# Altium PCB PCB1.pcbdoc (part 2 of 2)
Units mil, origin at the board's own origin, x right, y up, seen from the top; angles counter-clockwise.
Board outline 2760.2 x 1953.83 mil, 2 copper layers (Top Layer, Bottom Layer); 18 components, 51 nets, 238 pads, 251 vias.
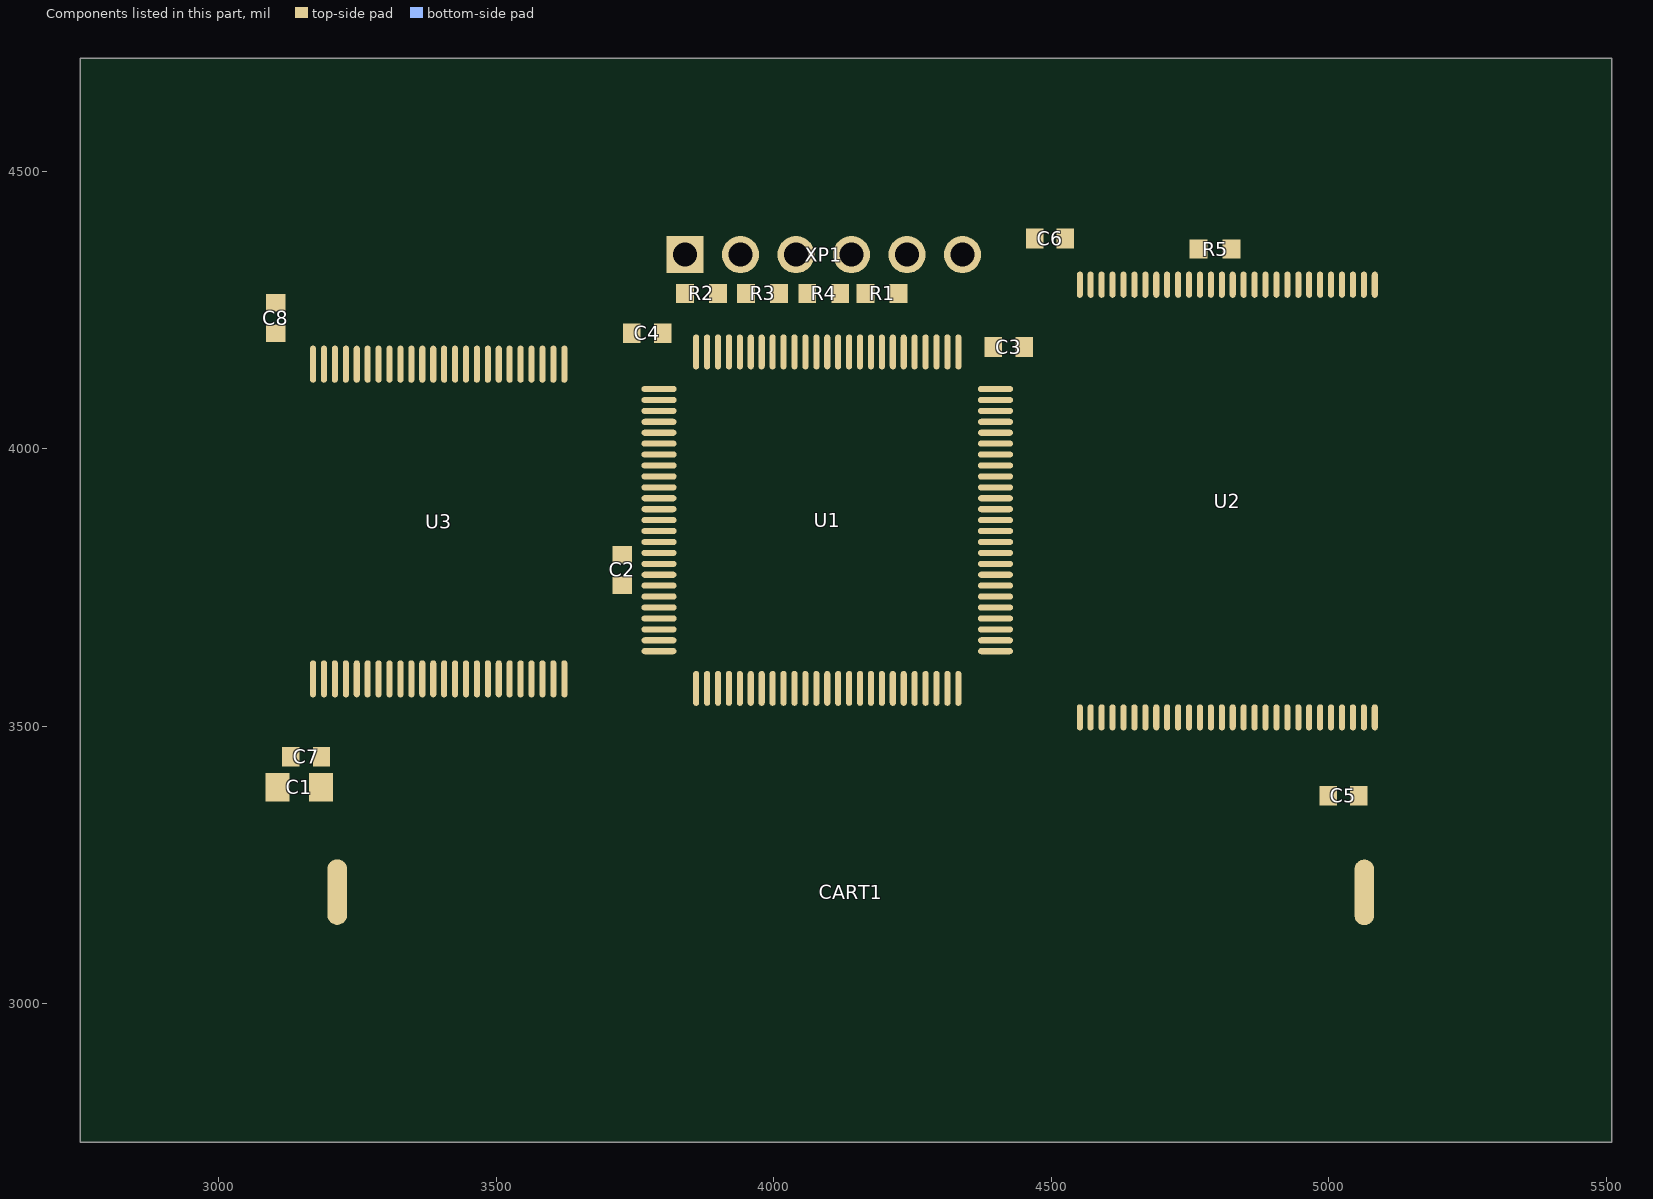
[diagram p2: the components of this part, seen from the top]

## Other copper
Top Layer:
  region net VCC: 3190,3430.28 3180,3430.28 3167.5,3415.28 3202.5,3415.28
  region net VCC: 3209.93,3357.05 3216.63,3364.5 3206.02,3392.78 3185.21,3364.1
  region net VCC: 3904.02,3612.23 3894.02,3609.96 3893.95,3594.13 3904.98,3594.13
  region net TDI: 3924.16,3611.45 3914.16,3611.45 3913.64,3594.13 3924.67,3594.13
  region net ~WR~: 3964.01,3609.67 3954.01,3612.29 3953.01,3594.13 3964.04,3594.13
  region net AD2: 4100.98,3535.21 4101.83,3542.16 4090.8,3542.16 4090.98,3535.21
  region net AD3: 4121.27,3532.87 4121.52,3542.16 4110.49,3542.16 4111.27,3532.87
  region net AD5: 4169.57,3535.06 4179.57,3535.06 4180.57,3542.16 4169.54,3542.16
  region net VCC: 4199.59,3611.64 4189.59,3611.07 4189.23,3594.13 4200.26,3594.13
  region net AD6: 4209.68,3612.03 4208.91,3594.13 4219.94,3594.13 4219.69,3610.57
  region net AD8: 4249.02,3532.82 4259.02,3532.82 4259.31,3542.16 4248.28,3542.16
  region net AD10: 4327.85,3533.37 4337.85,3533.37 4338.05,3542.16 4327.02,3542.16
  region net VCC: 4443.57,3650.2 4441.26,3660.2 4425.45,3660.26 4425.45,3649.24
  region net VCC: 4356.81,3659.82 4356.81,3649.82 4373.48,3649.24 4373.48,3660.26
  region net AD12: 4442.94,3679.3 4425.45,3679.95 4425.45,3668.93 4442.58,3669.3
  region net AD12: 4365.98,3679.47 4365.98,3669.47 4373.48,3668.93 4373.48,3679.95
  region net AD11: 4442.39,3699.28 4425.45,3699.63 4425.45,3688.61 4443.09,3689.28
  region net VCC: 4357.24,3787.36 4373.48,3787.04 4373.48,3798.06 4357.24,3797.36
  region net FA15: 4436.5,3856.6 4425.45,3857.11 4425.45,3846.09 4436.5,3846.6
  region net VCC: 4366.86,3886.38 4373.48,3885.46 4373.48,3896.48 4366.86,3896.38
  region net FA14: 4442.82,3905.69 4442.72,3915.69 4425.45,3916.17 4425.45,3905.15
  region net FA13: 4443.22,3935.11 4425.45,3935.85 4425.45,3924.83 4442.18,3925.11
  region net FA7: 4364.65,4023.67 4373.48,4023.26 4373.48,4034.28 4364.65,4033.67
  region net FA9: 4442.77,4063.14 4442.77,4073.14 4425.45,4073.65 4425.45,4062.63
  region net FA8: 4442.1,4082.26 4443.3,4092.24 4425.45,4093.33 4425.45,4082.31
  region net FA8: 4365.65,4083.12 4373.48,4082.31 4373.48,4093.33 4365.65,4093.12
  region net FA7: 4438.62,4102.18 4438.62,4112.18 4425.45,4113.02 4425.45,4102
  region net FA3: 4317.45,4130.41 4318.37,4148.46 4307.34,4148.46 4307.45,4132.39
  region net FA4: 4268.69,4130.74 4278.69,4131.64 4279,4148.46 4267.97,4148.46
  region net FA6: 4209.37,4131.4 4219.37,4131.4 4219.94,4148.46 4208.91,4148.46
  region net FA2: 4189.75,4209.43 4189.23,4200.43 4200.26,4200.43 4199.75,4209.43
  region net FA1: 4150.38,4217.75 4149.86,4200.43 4160.89,4200.43 4160.38,4217.75
  region net FA0: 4130.69,4131.14 4140.69,4131.14 4141.2,4148.46 4130.17,4148.46
  region net FA0: 4130.69,4217.75 4130.17,4200.43 4141.2,4200.43 4140.69,4217.75
  region net TCK: 4121.01,4217.75 4111.01,4217.75 4110.49,4200.43 4121.52,4200.43
  region net TMS: 4101.32,4131.14 4101.83,4148.46 4090.8,4148.46 4091.32,4131.14
  region net TMS: 4101.32,4217.75 4091.32,4217.75 4090.8,4200.43 4101.83,4200.43
  region net VCC: 4032.26,4217.39 4031.75,4200.43 4042.78,4200.43 4042.26,4218.03
  region net TDI: 3924.16,4131.14 3924.67,4148.46 3913.64,4148.46 3914.16,4131.14
  region net TDO: 3894.47,4217.75 3893.95,4200.43 3904.98,4200.43 3904.47,4217.75
  region net VCC: 3749.1,3984.83 3767.18,3983.89 3767.18,3994.91 3751.24,3994.83
  region net VCC: 3750.13,3817.35 3749.62,3807.35 3767.18,3806.72 3767.18,3817.74
  region net VCC: 3835.94,3817.45 3819.15,3817.74 3819.15,3806.72 3836.89,3807.45
  region net AD13: 3836.08,3778.03 3819.15,3778.37 3819.15,3767.35 3836.8,3768.03
  region net VCC: 3759.82,3817.35 3744.82,3824.83 3744.82,3794.85 3759.82,3807.35
  region net VCC: 3700.79,3821.91 3709.38,3793.34 3709.38,3824.83 3707.86,3828.98
  region net VCC: 4365.09,4187.62 4365.09,4177.62 4380.09,4165.45 4380.09,4200.12
  region net TCK: 4191.81,4296.27 4188.69,4307.29 4160.41,4296.69 4181.2,4267.98
  region net VCC: 3809.1,4274.96 3824.1,4262.69 3824.1,4296.69 3809.1,4284.96
  region net VCC: 3835,4311.69 3824.1,4296.69 3855.9,4296.69 3845,4311.69
  region net TDO: 3894.47,4247.69 3904.47,4247.69 3915.3,4262.69 3883.5,4262.69
  region net TDO: 3925.91,4299.12 3919.94,4307.29 3891.65,4296.69 3915.3,4270.84
  region net VCC: 4033.61,4252.08 4025.3,4278.07 3993.5,4262.69 4019.47,4252.08
  region net TDI: 3929.46,4252.08 3957.75,4262.69 3934.1,4288.53 3923.49,4260.25
  region net TDI: 3976.51,4299.12 3970.54,4307.29 3942.25,4296.69 3965.9,4270.84
  region net A23: 5077.81,4260.31 5087.81,4259.9 5088.41,4277.38 5077.41,4277.38
  region net A22: 5058.66,4259.3 5068.66,4261.64 5068.71,4277.38 5057.71,4277.38
  region net FA11: 4959.67,4260.18 4969.67,4260.01 4970.21,4277.38 4959.21,4277.38
  region net FA10: 4940.48,4259.41 4950.48,4261.21 4950.61,4277.38 4939.61,4277.38
  region net FA9: 4920.17,4260.72 4930.17,4259.62 4930.91,4277.38 4919.91,4277.38
  region net $1N60766: 4831.91,4330.88 4821.91,4330.88 4821.41,4313.58 4832.41,4313.58
  region net FA7: 4703.73,4260.28 4713.73,4259.92 4714.31,4277.38 4703.31,4277.38
  region net FA6: 4693.82,4320.66 4683.82,4320.66 4683.71,4313.58 4694.71,4313.58
  region net FA5: 4674.25,4331.37 4664.25,4330.2 4664.01,4313.58 4675.01,4313.58
  region net FA2: 4605,4267.39 4615,4267.39 4615.91,4277.38 4604.91,4277.38
  region net FA0: 4596.09,3542.16 4586.09,3542.16 4585.21,3533.98 4596.21,3533.98
  region net AD0: 4664.08,3542.58 4664.01,3533.98 4675.01,3533.98 4674.08,3542.58
  region net AD8: 4684.34,3541.67 4683.71,3533.98 4694.71,3533.98 4694.34,3541.67
  region net AD9: 4733.19,3551.88 4723.19,3550.36 4723.01,3533.98 4734.01,3533.98
  region net AD2: 4753.16,3551.37 4743.16,3551.17 4742.71,3533.98 4753.71,3533.98
  region net AD3: 4792.79,3480.93 4793.11,3497.78 4782.11,3497.78 4782.79,3480.14
  region net AD11: 4801.82,3549.27 4801.81,3533.98 4812.81,3533.98 4811.82,3551.68
  region net AD12: 4870.86,3479.7 4871.81,3497.78 4860.81,3497.78 4860.86,3482.03
  region net AD14: 4949.68,3479.72 4950.61,3497.78 4939.61,3497.78 4939.68,3481.92
  region net AD7: 4970,3550.49 4960,3551.83 4959.21,3533.98 4970.21,3533.98
  region net AD15: 4989.41,3551.28 4979.41,3551.28 4978.91,3533.98 4989.91,3533.98
  region net AD9: 3598.03,4106.58 3608.03,4107.47 3608.33,4124.26 3597.33,4124.26
  region net ~WR~: 3518.82,4110.59 3528.82,4110.59 3529.53,4124.26 3518.53,4124.26
  region net VCC: 3509.31,4185.46 3499.31,4185.46 3499.12,4181.57 3509.6,4182.03
  region net AD15: 3480,4106.46 3490,4107.68 3490.23,4124.26 3479.23,4124.26
  region net VCC: 3440.81,4193.31 3439.83,4180.16 3450.83,4180.16 3450.81,4193.31
  region net AD6: 3204.1,4107.05 3214.1,4106.9 3214.63,4124.26 3203.63,4124.26
  region net AD5: 3183.96,4108.74 3193.96,4106.14 3194.93,4124.26 3183.93,4124.26
  region net AD10: 3568,3631.23 3558,3629.02 3557.93,3613.16 3568.93,3613.16
  region net ~CS2~: 3539.17,3631.24 3538.23,3613.16 3549.23,3613.16 3549.17,3628.96
  region net A22: 3489.49,3630.91 3479.49,3629.84 3479.23,3613.16 3490.23,3613.16
  region net A21: 3459.6,3629.03 3459.53,3613.16 3470.53,3613.16 3469.6,3631.22
  region net A19: 3420.36,3629.74 3420.13,3613.16 3431.13,3613.16 3430.36,3630.97
  region net VCC: 3400.85,3551.34 3410.85,3551.34 3411.43,3557.26 3400.43,3557.26
  region net A18: 3371.74,3619.16 3361.74,3619.16 3361.13,3613.16 3372.13,3613.16
  region net AD1: 3223.34,3551.09 3233.34,3551.09 3234.33,3557.26 3223.33,3557.26
  region net AD3: 3164.4,3551.04 3174.4,3551.04 3175.23,3557.26 3164.23,3557.26
  region net VCC: 5025.26,3393.32 5020.81,3403.01 4992.52,3392.4 5014.65,3356.97
  region net VCC: 4499.01,4357.65 4505.76,4350.26 4534.04,4360.87 4509.61,4385.94
  region net VCC: 3158.78,3464.46 3169.25,3435.81 3192.21,3462.4 3164.28,3473.14
  region net VCC: 3190,3411.97 3200.75,3426.97 3169.25,3426.97 3180,3411.97
  region net VCC: 3215.75,3433.11 3215.75,3443.11 3200.75,3455.61 3200.75,3426.97
  region net TMS: 4099.85,4252.47 4127.75,4262.69 4103.8,4288.23 4093.19,4259.95
  region net TMS: 4125,4311.69 4115,4311.69 4103.8,4296.69 4135.6,4296.69
  region net VCC: 4784.95,4387.29 4756.66,4376.69 4781.2,4351.72 4791.81,4380.01
  region net VCC: 4745.58,4387.29 4738.79,4379.94 4749.4,4351.65 4773.86,4376.69
  region net $1N60766: 4831.91,4327.69 4840.6,4342.69 4809.41,4342.69 4821.91,4327.69
  region net VCC: 3098.72,4176.88 3108.72,4176.88 3120.12,4191.88 3086.22,4191.88
  region net VCC: 3135.12,4212.72 3120.12,4223.37 3120.12,4191.88 3135.12,4202.72
  region net VCC: 3713.65,4212.39 3713.65,4202.39 3728.65,4190.5 3728.65,4224.89
  region net VCC: 3835,4301.24 3845,4301.24 3857.5,4316.24 3822.5,4316.24
  region net TDI: 4010.63,4365.7 3988.41,4325.17 3992.18,4314.8 4027.78,4318.55
  region net TMS: 4106.66,4346.95 4115,4297.39 4125,4289.93 4146.88,4316.95
  region net TCK: 4206.72,4353.08 4195.48,4314.08 4202.27,4306.73 4240.79,4316.25
  region net A17: 4515.04,3311.84 4517.67,3301.55 4527.67,3301.94 4530.03,3312.43
  region net A18: 4574.32,3311.91 4576.91,3301.6 4586.91,3301.89 4589.31,3312.35
  region net A19: 4633.08,3311.95 4635.66,3301.62 4645.66,3301.87 4648.08,3312.31
  region net A20: 4691.73,3311.7 4694.42,3301.45 4704.42,3302.04 4706.7,3312.58
  region net A21: 4751.02,3311.79 4753.66,3301.52 4763.66,3301.97 4766,3312.48
  region net A22: 4810.36,3312.02 4812.91,3301.67 4822.91,3301.82 4825.36,3312.24
  region net A23: 4869.35,3312.13 4871.85,3301.74 4881.85,3301.74 4884.35,3312.13
  region net ~CS2~: 4927.41,3312.13 4929.91,3301.74 4939.91,3301.74 4942.41,3312.13
  region net A17: 4533.61,3595.39 4539.19,3604.51 4532.12,3611.58 4523.01,3606
  region net A18: 4590.64,3628.93 4595.81,3638.5 4583.97,3640.8 4575.91,3631.78
  region net A19: 4647.94,3585.54 4645.44,3595.92 4635.44,3595.92 4632.94,3585.54
  region net A20: 4708.93,3687.74 4714.71,3696.82 4707.99,3704.24 4698.85,3698.86
  region net A21: 4767.77,3776.04 4773.35,3785.16 4766.28,3792.23 4757.17,3786.65
  region net A22: 4825.52,3578.68 4831.57,3587.71 4825.24,3595.52 4816.08,3590.33
  region net A23: 4887.97,3597.3 4893.54,3606.42 4886.47,3613.49 4877.36,3607.91
  region net ~WR~: 3951.51,4010.4 3954.01,4000.02 3964.01,4000.04 3966.51,4010.43
  region net ~WR~: 3525.89,4023.36 3523.39,4033.75 3513.39,4033.75 3510.89,4023.36
  region net ~WR~: 4852.99,4027.16 4850.49,4037.54 4840.49,4037.54 4837.99,4027.16
  region net ~CS~: 4010.41,3632.78 4013.26,3622.66 4023.26,3623.86 4025.3,3634.56
  region net ~CS~: 4310.64,3469.27 4322.79,3468.41 4329.92,3478.41 4319.35,3481.48
  region net AD0: 3513.59,3312.13 3516.09,3301.74 3526.09,3301.74 3528.59,3312.13
  region net AD0: 3530.97,3317.23 3536.95,3326.27 3530.51,3333.98 3521.36,3328.74
  region net AD0: 3309.16,3530.18 3298.77,3527.68 3298.77,3517.68 3309.16,3515.18
  region net AD1: 3590.07,3314.5 3597.65,3323.11 3593.37,3332.98 3584.09,3328.26
  region net AD1: 3573.67,3311.96 3576.24,3301.63 3586.24,3301.86 3588.66,3312.3
  region net AD1: 3391.4,3504.88 3381.11,3502.26 3381.48,3492.26 3391.96,3489.89
  region net AD2: 3646.58,3315.86 3653.3,3324.73 3647.88,3333.46 3638.68,3328.6
  region net AD2: 3629.51,3312.13 3632.01,3301.74 3642.01,3301.74 3644.51,3312.13
  region net AD2: 3441.67,3489.91 3435.75,3480.86 3442.27,3473.24 3451.43,3478.52
  region net AD3: 3704.24,3313.15 3712.83,3321.39 3709.91,3332.61 3700.46,3327.67
  region net AD3: 3688.56,3312.01 3691.11,3301.66 3701.11,3301.82 3703.56,3312.25
  region net AD3: 3486.78,3500.38 3478.11,3492.18 3480.91,3480.84 3490.38,3485.82
  region net AD0: 4030.02,3677.45 4033.07,3667.49 4043.07,3669.67 4044.67,3680.65
  region net AD0: 4661.55,3543.76 4664.08,3533.4 4674.08,3533.51 4676.54,3543.92
  region net AD1: 4074.18,3712.75 4079.7,3710.77 4086.77,3717.84 4084.79,3723.36
  region net AD1: 4713.13,3645.37 4707.56,3636.26 4714.63,3629.19 4723.74,3634.76
  region net AD2: 4773.95,3654.18 4768.75,3644.6 4780.64,3642.34 4788.68,3651.39
  region net AD2: 4091.73,3775.63 4094.23,3765.24 4104.23,3765.24 4106.73,3775.63
  region net ~RD~: 4566.95,3578.63 4577.4,3581.04 4577.66,3591.04 4567.33,3593.62
  region net ~RD~: 3987.96,3719.51 3991.07,3709.59 4001.07,3712.21 4002.47,3723.31
  region net ~RD~: 4552.89,3743.31 4555.39,3732.92 4565.39,3732.92 4567.89,3743.31
  region net ~RD~: 4567.93,3669.64 4565.39,3679.99 4555.39,3679.85 4552.94,3669.43
  region net AD3: 4123.81,3536.34 4121.27,3546.7 4111.27,3546.58 4108.81,3536.17
  region net AD3: 4292.4,3449.22 4302.54,3452.41 4296.81,3462.41 4284.94,3462.23
  region net AD3: 4292.4,3449.22 4302.54,3452.41 4296.81,3462.41 4284.94,3462.23
  region net AD4: 3761.77,3317.39 3767.67,3326.45 3761.11,3334.04 3751.96,3328.74
  region net AD4: 3744.07,3312.48 3746.41,3301.97 3756.41,3301.52 3759.05,3311.79
  region net AD4: 3745.63,3554.67 3736.51,3560.24 3729.44,3553.17 3735.02,3544.06
  region net AD4: 3649.32,3835.25 3651.82,3824.87 3661.82,3824.87 3664.32,3835.25
  region net AD4: 4840.7,3570.01 4843.2,3559.62 4853.2,3559.62 4855.7,3570.01
  region net AD4: 3178.04,3850.69 3175.54,3861.08 3165.54,3861.08 3163.04,3850.69
  region net AD5: 3807.75,3312.1 3810.26,3301.73 3820.26,3301.76 3822.75,3312.15
  region net AD5: 3824.88,3316.14 3831.43,3325.06 3825.8,3333.57 3816.6,3328.65
  region net AD5: 3780.63,3554.67 3771.51,3560.24 3764.44,3553.17 3770.02,3544.06
  region net AD5: 3675.1,3867.67 3677.6,3857.28 3687.6,3857.28 3690.1,3867.67
  region net AD5: 4891.36,3578.1 4886.45,3568.9 4895.03,3563.34 4903.94,3569.94
  region net AD5: 3197.18,3883.31 3193.96,3893.23 3183.96,3888.96 3183.39,3877.42
  region net ~RD~: 3598.96,3477.82 3609.02,3481.03 3603.7,3491.03 3591.91,3491.06
  region net ~RD~: 3580.7,3485.9 3572.9,3477.36 3576.88,3467.2 3586.18,3471.94
  region net ~RD~: 3629.89,3553.41 3626.7,3563.29 3616.7,3559.79 3615.74,3548.45
  region net AD6: 4206.11,3895.15 4208.65,3884.77 4218.65,3884.81 4221.11,3895.21
  region net AD6: 4918.8,3600.46 4921.3,3590.08 4931.3,3590.08 4933.8,3600.46
  region net AD6: 3217.12,3911.72 3214.1,3921.7 3204.1,3919.7 3202.41,3908.77
  region net AD7: 4228.12,3920.91 4231.01,3910.83 4241.01,3912.29 4242.97,3923.07
  region net AD7: 4957.5,3568.07 4960,3557.69 4970,3557.69 4972.5,3568.07
  region net AD7: 3237.39,3942.14 3234.37,3952.13 3224.37,3950.13 3222.68,3939.19
  region net AD8: 4676.2,3596.31 4685.31,3590.73 4692.38,3597.8 4686.81,3606.91
  region net AD8: 4249.12,3702.79 4250.8,3691.86 4260.8,3689.85 4263.82,3699.84
  region net AD8: 4265.27,3714.41 4262.77,3724.8 4252.77,3724.8 4250.27,3714.41
  region net AD8: 4250.3,4054.81 4252.77,4044.4 4262.77,4044.3 4265.3,4054.66
  region net AD8: 3569.85,4065.02 3567.35,4075.4 3557.35,4075.4 3554.85,4065.02
  region net AD9: 4906.31,4079.36 4909.31,4069.36 4919.31,4071.23 4921.05,4082.13
  region net AD9: 3610.91,4095.03 3608.03,4105.13 3598.03,4103.81 3596.04,4093.07
  region net AD9: 4272.05,4072.81 4275,4061.8 4285,4070 4283.65,4082.32
  region net AD10: 4935.74,3941.29 4944.85,3935.71 4951.92,3942.78 4946.35,3951.9
  region net AD10: 3555.9,3947.37 3558,3936.7 3568,3935.63 3570.82,3945.78
  region net AD10: 4295.76,3943.71 4298.26,3933.32 4308.26,3933.32 4310.76,3943.71
  region net AD11: 4814.87,3625.77 4808.27,3616.86 4813.83,3608.28 4823.03,3613.18
  region net AD11: 3633.18,3826.49 3630.34,3836.61 3620.34,3835.46 3618.28,3824.77
  region net AD12: 4362.82,3417.26 4373.15,3420.41 4366.74,3430.41 4354.73,3429.89
  region net AD12: 4343.88,3423.63 4336.72,3414.87 4341.55,3405.56 4350.78,3410.31
  region net AD12: 4360.83,3502.82 4367.25,3511.77 4361.44,3520.1 4352.25,3515.12
  region net AD12: 4357.09,3513.21 4354.05,3523.18 4344.05,3521.07 4342.41,3510.11
  region net AD12: 4305.08,3969.65 4314.27,3964.7 4320.01,3973.1 4313.54,3982.04
  region net AD12: 3257.76,3985.24 3255.19,3995.58 3245.19,3995.37 3242.77,3984.93
  region net AD11: 4474.94,3809.55 4477.4,3799.14 4487.4,3799.04 4489.93,3809.4
  region net AD13: 4389.72,3401.24 4399.94,3404.41 4393.9,3414.41 4381.97,3414.07
  region net AD13: 4370.2,3404.86 4364.63,3395.75 4371.7,3388.68 4380.81,3394.25
  region net AD13: 4391.56,3504.81 4396.38,3514.03 4387.51,3519.29 4378.66,3512.46
  region net AD13: 4514.21,3756.61 4517.36,3746.34 4527.36,3752.59 4526.93,3764.56
  region net AD13: 3547.99,3780.22 3545.49,3790.61 3535.49,3790.61 3532.99,3780.22
  region net AD14: 4430.21,3385.27 4440.57,3388.41 4434.04,3398.41 4422.01,3397.84
  region net AD14: 4410.59,3388.57 4405.01,3379.46 4412.09,3372.39 4421.2,3377.96
  region net AD14: 4428.45,3511.3 4425.95,3521.68 4415.95,3521.68 4413.45,3511.3
  region net AD14: 4548.19,3991.55 4551.19,3981.55 4561.19,3983.46 4562.92,3994.36
  region net AD14: 3277.66,4009.57 3274.6,4020.19 3264.6,4012.9 3265.54,4000.72
  region net AD15: 4983.14,4031.54 4985.64,4021.16 4995.64,4021.16 4998.14,4031.54
  region net AD15: 4997.26,3789.5 4995.64,3800.47 4985.64,3802.63 4982.6,3792.66
  region net AD15: 4982.5,3603.07 4985,3592.69 4995,3592.69 4997.5,3603.07
  region net AD15: 3492.5,4046.3 3490,4056.69 3480,4056.69 3477.5,4046.3
  region net A16: 4473.71,3317.42 4479.6,3326.48 4473.03,3334.05 4463.88,3328.74
  region net A16: 4456.38,3312.04 4458.92,3301.69 4468.92,3301.8 4471.38,3312.21
  region net A16: 3820.44,3527.61 3810.19,3524.44 3816.34,3514.44 3828.3,3514.83
  region net A17: 3339.34,3637.35 3341.23,3626.55 3351.23,3624.99 3354.16,3635.04
  region net A18: 3279.14,3668.57 3284.72,3677.68 3277.65,3684.75 3268.54,3679.17
  region net A19: 3257.04,3690.67 3262.62,3699.78 3255.55,3706.85 3246.43,3701.28
  region net A20: 3233.46,3714.25 3239.04,3723.36 3231.97,3730.43 3222.86,3724.85
  region net A21: 3209.34,3740.15 3214.92,3749.26 3207.84,3756.33 3198.73,3750.75
  region net A22: 3185.03,3766.67 3190.6,3775.78 3183.53,3782.85 3174.42,3777.28
  region net A23: 3160.71,3790.98 3166.29,3800.1 3159.22,3807.17 3150.1,3801.59
  region net ~CS2~: 3138.61,3813.09 3141.53,3819.54 3134.45,3826.61 3128,3823.69
  region net FA15: 4598.99,4070.49 4588.6,4067.99 4588.6,4057.99 4598.99,4055.49
  region net FA14: 4493.05,3968.99 4495.55,3958.61 4505.55,3958.61 4508.05,3968.99
  region net FA14: 5026.71,3980.17 5024.42,3990.7 5014.42,3991.27 5011.74,3981.02
  region net FA13: 4620.04,4105.77 4615.32,4096.51 4625.05,4092.1 4633.7,4099.59
  region net FA13: 5015.8,4108.34 5016.57,4120.45 5006.57,4127.39 5003.48,4116.89
  region net FA12: 4609.49,4135.58 4604.56,4126.39 4613.04,4120.73 4621.97,4127.26
  region net FA12: 4999.97,4133.97 5000.57,4146.01 4990.57,4152.61 4987.45,4142.23
  region net FA11: 4602.4,4161.72 4597.65,4152.49 4606.95,4147.65 4615.71,4154.81
  region net FA11: 4981.77,4168.54 4979.27,4178.93 4969.27,4178.93 4966.77,4168.54
  region net FA10: 4591.94,4185.29 4587.22,4176.02 4596.95,4171.61 4605.6,4179.1
  region net FA10: 4959.76,4193.37 4957.26,4203.76 4947.26,4203.76 4944.76,4193.37
  region net FA9: 4568.26,4190.43 4561.76,4180.09 4575.8,4180 4583.26,4190.33
  region net FA9: 4568.26,4190.43 4561.76,4180.09 4575.8,4180 4583.26,4190.33
  region net FA9: 4937.74,4218.21 4935.24,4228.59 4925.24,4228.59 4922.74,4218.21
  region net FA8: 4540.46,4187.21 4535.71,4177.9 4546.01,4174.05 4554.52,4181.97
  region net FA8: 4915.73,4239.65 4913.23,4250.04 4903.23,4250.04 4900.73,4239.65
  region net FA7: 4512.86,4192.87 4508.03,4183.65 4516.85,4178.34 4525.71,4185.12
  region net FA7: 4716.23,4255.45 4713.73,4265.84 4703.73,4265.84 4701.23,4255.45
  region net FA3: 4318.58,4113.37 4317.45,4124.63 4307.45,4127.79 4304.28,4117.9
  region net FA3: 4621.54,4328.97 4624.04,4318.59 4634.04,4318.59 4636.54,4328.97
  region net FA4: 4642.51,4345.31 4645.32,4335.15 4655.32,4336.16 4657.44,4346.81
  region net FA5: 4235.95,4110.11 4238.16,4115.86 4231.09,4122.94 4225.34,4120.72
  region net FA5: 4663.12,4331.28 4664.25,4320.04 4674.25,4316.88 4677.42,4326.77
  region net FA6: 4204.39,4110.81 4209.96,4119.92 4202.89,4126.99 4193.78,4121.42
  region net FA6: 4685.79,4364.52 4688.26,4354.11 4698.26,4354.04 4700.79,4364.41
  region net FA0: 4593.4,3555.07 4587.82,3545.96 4594.89,3538.89 4604.01,3544.47
  region net FA0: 4621.92,3604.65 4627.5,3613.76 4620.42,3620.83 4611.31,3615.25
  region net FA0: 4656.28,3660.96 4658.78,3657.11 4668.78,3657.11 4671.28,3660.96
  region net FA0: 4608.97,3712.87 4606.47,3723.26 4596.47,3723.26 4593.97,3712.87
  region net FA0: 4594,3808.6 4596.47,3798.19 4606.47,3798.09 4609,3808.45
  region net FA0: 4165.87,3805.76 4163.37,3816.14 4153.37,3816.14 4150.87,3805.76
  region net VCC: 3426.97,3444.09 3415.64,3443.11 3412.17,3433.11 3422.05,3429.92
  region net VCC: 3427.43,3540.36 3418.32,3545.94 3411.25,3538.87 3416.83,3529.76
  region net VCC: 3957.14,4119.21 3967.52,4121.71 3967.52,4131.71 3957.14,4134.21
  region net VCC: 3888.7,4135.54 3877.35,4134.58 3873.85,4124.58 3883.73,4121.39
  region net VCC: 4338.89,4177.75 4350.74,4177.62 4356.37,4187.62 4346.25,4190.82
  region net VCC: 4029.91,4234.6 4032.32,4224.19 4042.32,4224.1 4044.91,4234.46
  region net VCC: 4047.45,4240.52 4053.03,4249.63 4045.96,4256.7 4036.85,4251.13
  region net VCC: 4038.1,4251.13 4028.99,4256.7 4021.92,4249.63 4027.49,4240.52
  region net VCC: 3890.79,3605.12 3894.02,3595.18 3904.02,3599.76 3904.43,3611.37
  region net VCC: 3904.43,3617.15 3904.02,3628.76 3894.02,3633.34 3890.79,3623.4
  region net VCC: 4186.46,3605.91 4189.59,3596 4199.59,3598.72 4200.94,3609.84
  region net VCC: 4198.94,3621.43 4196.2,3631.64 4186.2,3630.87 4183.98,3620.28
  region net VCC: 4183.7,3653.11 4186.2,3642.72 4196.2,3642.72 4198.7,3653.11
  region net VCC: 4358.52,3647.51 4369.04,3649.82 4369.58,3659.82 4359.32,3662.49
  region net VCC: 4355.71,3664.77 4346.91,3671.79 4337.78,3666.78 4342.56,3657.55
  region net VCC: 4440.66,4281.43 4446.06,4290.56 4438.66,4297.31 4429.58,4291.53
  region net VCC: 5038.68,3425.14 5033.74,3415.94 5042.19,3410.25 5051.12,3416.75
  region net VCC: 5058.27,3423.91 5064.78,3432.84 5059.08,3441.29 5049.89,3436.35
  region net VCC: 4904.16,3346.79 4893.05,3345.41 4890.4,3335.41 4900.32,3332.29
  region net VCC: 4836.41,3347.91 4826.02,3345.41 4826.02,3335.41 4836.41,3332.91
  region net VCC: 4849.64,3332.91 4860.02,3335.41 4860.02,3345.41 4849.64,3347.91
  region net VCC: 4844.42,3460.31 4835.48,3466.76 4827.11,3460.99 4832.07,3451.8
  region net VCC: 4558.47,3332.61 4568.63,3335.41 4567.65,3345.41 4557,3347.54
  region net VCC: 4550.26,3523.17 4541.43,3530.08 4532.45,3524.91 4537.25,3515.7
  region net VCC: 4440.19,3661.19 4428.86,3660.2 4425.42,3650.2 4435.3,3647.01
  region net VCC: 4516.3,3537.53 4525.41,3531.95 4532.49,3539.02 4526.91,3548.14
  region net VCC: 3855.33,3789.71 3864.43,3784 3871.72,3790.84 3866.27,3799.97
  region net VCC: 3856.59,3809.66 3847.46,3815.11 3840.61,3807.81 3846.32,3798.72
  region net AD15: 4349.79,3804.98 4361.16,3805.88 4364.78,3815.88 4354.9,3819.09
  region net AD15: 4175.6,4033.6 4177.69,4022.92 4187.69,4021.83 4190.51,4031.96
  region net AD15: 4190.19,3821.96 4187.69,3832.35 4177.69,3832.35 4175.19,3821.96
  region net AD13: 3859.59,3770.85 3850.47,3776.42 3843.4,3769.35 3848.98,3760.24
Bottom Layer:
  region net A17: 4514.77,3312.13 4517.27,3301.74 4527.27,3301.74 4529.77,3312.13
  region net A17: 4531.41,3322.81 4530.27,3334.05 4520.27,3337.19 4517.1,3327.3
  region net A18: 4571.64,3319.37 4566.06,3310.26 4573.13,3303.19 4582.24,3308.76
  region net A18: 4589.4,3325.02 4587.06,3335.52 4577.06,3335.96 4574.41,3325.68
  region net A19: 4630.42,3318.73 4625.09,3309.59 4632.61,3302.97 4641.68,3308.82
  region net A19: 4650.4,3318.12 4655.98,3327.23 4648.9,3334.3 4639.79,3328.72
  region net A20: 4688.84,3318.3 4683.66,3309.13 4691.49,3302.82 4700.52,3308.89
  region net A20: 4706.43,3325.24 4703.99,3335.66 4693.99,3335.82 4691.44,3325.48
  region net A21: 4748.23,3318.09 4743.12,3308.91 4751.1,3302.75 4760.11,3308.92
  region net A21: 4758.83,3328.72 4749.72,3334.3 4742.65,3327.23 4748.23,3318.12
  region net A22: 4808.03,3316.41 4803.27,3307.18 4812.52,3302.28 4821.29,3309.39
  region net A22: 4825.26,3325.36 4822.76,3335.74 4812.76,3335.74 4810.26,3325.36
  region net A23: 4866.86,3319.37 4861.29,3310.26 4868.36,3303.19 4877.47,3308.76
  region net A23: 4884.35,3325.36 4881.85,3335.74 4871.85,3335.74 4869.35,3325.36
  region net ~CS2~: 4924.93,3319.37 4919.36,3310.26 4926.43,3303.19 4935.54,3308.76
  region net A17: 4523.01,3586.04 4532.12,3580.46 4539.19,3587.54 4533.61,3596.65
  region net A18: 4574.54,3617.21 4577.06,3606.84 4587.06,3606.88 4589.54,3617.28
  region net A19: 4632.94,3572.31 4635.44,3561.92 4645.44,3561.92 4647.94,3572.31
  region net A20: 4691.49,3682.24 4693.99,3671.86 4703.99,3671.86 4706.49,3682.24
  region net A21: 4747.81,3777.3 4742.24,3768.18 4749.31,3761.11 4758.42,3766.69
  region net A22: 4809.71,3572.3 4812.76,3562.33 4822.76,3564.48 4824.38,3575.45
  region net A23: 4869.78,3592.22 4871.85,3581.53 4881.85,3580.38 4884.68,3590.5
  region net ~WR~: 3952.38,4024.53 3941.99,4022.03 3941.99,4012.03 3952.38,4009.53
  region net ~WR~: 3966.54,4010.47 3976.64,4013.36 3975.3,4023.36 3964.55,4025.34
  region net ~WR~: 3525.21,4009.44 3535.53,4012.03 3535.25,4022.03 3524.79,4024.43
  region net ~WR~: 4838.81,4027.98 4828.45,4025.45 4828.54,4015.45 4838.94,4012.98
  region net ~CS~: 4022.31,3631.73 4033.17,3633.55 4034.89,3643.55 4024.86,3646.51
  region net ~CS~: 4317.11,3485.83 4314.61,3496.21 4304.61,3496.21 4302.11,3485.83
  region net AD0: 3516.55,3327.65 3507.1,3332.61 3504.21,3321.36 3512.82,3313.13
  region net AD0: 3311.09,3513.85 3319.6,3505.96 3329.87,3509.84 3325.12,3519.15
  region net AD1: 3584.17,3328.23 3575.33,3335.11 3566.39,3329.9 3571.2,3320.68
  region net AD1: 3403.01,3488.82 3412.5,3483.8 3415.19,3495.24 3406.45,3503.42
  region net AD2: 3637.01,3328.74 3627.86,3334.07 3621.24,3326.56 3627.09,3317.49
  region net AD2: 3458.19,3481.02 3466.35,3483.52 3466.35,3493.52 3458.19,3496.02
  region net AD3: 3693,3328.3 3683.74,3333.02 3679.35,3323.27 3686.84,3314.62
  region net AD3: 3501.61,3487.19 3512,3489.69 3512,3499.69 3501.61,3502.19
  region net AD0: 4041.53,3677.22 4052.26,3679.22 4053.56,3689.22 4043.47,3692.1
  region net AD0: 4676.47,3557.07 4673.97,3567.45 4663.97,3567.45 4661.47,3557.07
  region net AD1: 4084.62,3720.78 4095.38,3723.8 4087.74,3733.8 4075.51,3732.71
  region net AD1: 4729.17,3652.7 4726.15,3662.69 4716.15,3660.69 4714.46,3649.76
  region net AD2: 4790.05,3665.9 4787.55,3676.29 4777.55,3676.29 4775.05,3665.9
  region net AD2: 4101.21,3772.44 4113.09,3772.24 4118.86,3782.24 4108.71,3785.43
  region net ~RD~: 4568.03,3592.91 4565.53,3603.29 4555.53,3603.29 4553.03,3592.91
  region net ~RD~: 4003.52,3727.18 4009.09,3736.3 4002.02,3743.37 3992.91,3737.79
  region net ~RD~: 4550.86,3752.97 4540.66,3749.8 4546.63,3739.8 4558.55,3740.09
  region net ~RD~: 4553.03,3656.3 4555.53,3645.92 4565.53,3645.92 4568.03,3656.3
  region net AD3: 4115.76,3519.66 4124.87,3514.09 4131.94,3521.16 4126.36,3530.27
  region net AD3: 4276.32,3459.93 4265.93,3457.43 4265.93,3447.43 4276.32,3444.93
  region net AD4: 3759.05,3325.69 3756.41,3335.97 3746.41,3335.51 3744.07,3325.01
  region net AD4: 3743.48,3534.8 3746.41,3523.72 3756.41,3532.06 3755,3544.41
  region net AD4: 3650.2,3849.37 3639.82,3846.87 3639.82,3836.87 3650.2,3834.37
  region net AD4: 3666.8,3841.24 3671.77,3849.75 3664.7,3856.82 3656.19,3851.85
  region net AD4: 4855.7,3583.24 4853.2,3593.62 4843.2,3593.62 4840.7,3583.24
  region net AD4: 3175.33,3835.3 3186.33,3836.87 3188.6,3846.87 3178.65,3849.93
  region net AD5: 3822.73,3325.36 3820.23,3335.74 3810.23,3335.74 3807.73,3325.36
  region net AD5: 3779.37,3534.71 3788.49,3529.13 3795.56,3536.2 3789.98,3545.31
  region net AD5: 3676.76,3882.4 3666.11,3880.27 3665.12,3870.27 3675.28,3867.47
  region net AD5: 3689.22,3866.78 3699.6,3869.28 3699.6,3879.28 3689.22,3881.78
  region net AD5: 4908.75,3586.19 4906.25,3596.57 4896.25,3596.57 4893.75,3586.19
  region net AD5: 3200.21,3867.47 3210.37,3870.27 3209.38,3880.27 3198.73,3882.4
  region net ~RD~: 3597.23,3487.79 3594.8,3498.23 3584.8,3498.43 3582.24,3488.1
  region net ~RD~: 3615.05,3545.63 3609.33,3536.54 3616.17,3529.24 3625.3,3534.69
  region net AD6: 4206.97,3909.29 4196.58,3906.79 4196.58,3896.79 4206.97,3894.29
  region net AD6: 4220.19,3894.29 4230.58,3896.79 4230.58,3906.79 4220.19,3909.29
  region net AD6: 4934.01,3613.44 4931.62,3623.91 4921.62,3624.24 4919.02,3613.93
  region net AD6: 3216.07,3895.1 3227,3896.79 3229.01,3906.79 3219.02,3909.81
  region net AD7: 4227.98,3936.03 4217.59,3933.53 4217.59,3923.53 4227.98,3921.03
  region net AD7: 4240.24,3920.28 4250.95,3922.31 4252.19,3932.31 4242.08,3935.17
  region net AD7: 4968.19,3584.16 4965,3594.32 4955,3588.54 4955.2,3576.66
  region net AD7: 3232.56,3924.26 3244.65,3923.53 3251.49,3933.53 3241.03,3936.64
  region net AD8: 4672.18,3615.14 4662.71,3620.13 4659.93,3608.77 4668.62,3600.57
  region net AD8: 4264.38,3700.3 4274.77,3702.8 4274.77,3712.8 4264.38,3715.3
  region net AD8: 3572.33,4057.78 3573.83,4062.82 3566.76,4069.89 3561.72,4068.38
  region net AD9: 4903.77,4092.19 4893.88,4088.99 4897.33,4078.99 4908.65,4078
  region net AD9: 3606.16,4077.66 3618.08,4077.35 3624.08,4087.35 3613.87,4090.52
  region net AD9: 4266.8,4089.96 4256.49,4087.35 4256.83,4077.35 4267.3,4074.97
  region net AD10: 4928.55,3957.51 4918.53,3954.53 4920.29,3944.53 4931.16,3942.74
  region net AD10: 3567.52,3943.77 3578.95,3944.53 3582.84,3954.53 3572.94,3957.75
  region net AD10: 4309.26,3942.33 4319.86,3944.53 4320.65,3954.53 4310.45,3957.28
  region net AD10: 4296.08,3957.28 4285.88,3954.53 4286.67,3944.53 4297.26,3942.33
  region net AD11: 4833.5,3627.44 4832.17,3638.59 4822.17,3641.36 4819.04,3631.45
  region net AD11: 3633.1,3811.56 3643.49,3814.06 3643.49,3824.06 3633.1,3826.56
  region net AD12: 4359.16,3428.05 4356.11,3438.02 4346.11,3435.88 4344.49,3424.91
  region net AD12: 4343.61,3498.57 4346.11,3488.19 4356.11,3488.19 4358.61,3498.57
  region net AD12: 3257.01,3970.98 3267.4,3973.48 3267.4,3983.48 3257.01,3985.98
  region net AD11: 4487.63,3824.67 4484.46,3834.56 4474.46,3831.36 4473.34,3820.11
  region net AD13: 4387.68,3410.85 4385.18,3421.23 4375.18,3421.23 4372.68,3410.85
  region net AD13: 4373.3,3497.58 4375.18,3486.77 4385.18,3485.2 4388.12,3495.25
  region net AD13: 3541.06,3763.62 3550.23,3758.48 3556.45,3766.4 3550.33,3775.42
  region net AD14: 4428.07,3394.56 4425.57,3404.94 4415.57,3404.94 4413.07,3394.56
  region net AD14: 4413.21,3498.36 4415.57,3487.88 4425.57,3487.49 4428.19,3497.79
  region net AD14: 4550.28,4008.6 4539.03,4007.48 4535.86,3997.48 4545.75,3994.31
  region net AD14: 3278.5,3990.26 3290.08,3990.75 3294.51,4000.75 3284.58,4003.98
  region net AD15: 4986.96,4047.45 4975.59,4046.54 4971.99,4036.54 4981.88,4033.34
  region net AD15: 4982.09,3776.97 4985,3766.91 4995,3768.38 4996.92,3779.17
  region net AD15: 4997.5,3616.3 4995,3626.69 4985,3626.69 4982.5,3616.3
  region net AD15: 3490.04,4031.05 3500.96,4032.75 3502.93,4042.75 3492.94,4045.76
  region net A16: 4463.73,3328.74 4454.58,3334.05 4448,3326.48 4453.89,3317.42
  region net A16: 3829.37,3514.71 3838.49,3509.13 3845.56,3516.2 3839.98,3525.31
  region net A17: 3341.16,3650.23 3330.77,3647.73 3330.77,3637.73 3341.16,3635.23
  region net A18: 3261.66,3662.58 3264.16,3652.19 3274.16,3652.19 3276.66,3662.58
  region net A19: 3239.56,3684.68 3242.06,3674.3 3252.06,3674.3 3254.56,3684.68
  region net A20: 3215.98,3708.26 3218.48,3697.87 3228.48,3697.87 3230.98,3708.26
  region net A21: 3191.86,3734.16 3194.36,3723.77 3204.36,3723.77 3206.86,3734.16
  region net A22: 3167.55,3760.68 3170.05,3750.3 3180.05,3750.3 3182.55,3760.68
  region net A23: 3143.23,3785 3145.73,3774.61 3155.73,3774.61 3158.23,3785
  region net ~CS2~: 3121.13,3807.1 3123.63,3796.71 3133.63,3796.71 3136.13,3807.1
  region net FA15: 4612.22,4055.49 4622.6,4057.99 4622.6,4067.99 4612.22,4070.49
  region net FA15: 5033.3,4070.92 5023.25,4067.99 5024.8,4057.99 5035.6,4056.1
  region net FA14: 4507.16,3968.11 4517.55,3970.61 4517.55,3980.61 4507.16,3983.11
  region net FA14: 5013.54,3982.46 5002.71,3980.61 5001.07,3970.61 5011.11,3967.66
  region net FA13: 4636.21,4101.21 4646.6,4103.71 4646.6,4113.71 4636.21,4116.21
  region net FA13: 5000.48,4115.6 4989.68,4113.71 4988.13,4103.71 4998.19,4100.78
  region net FA12: 4626.01,4129.42 4636.4,4131.92 4636.4,4141.92 4626.01,4144.42
  region net FA12: 4987.37,4142.21 4975.7,4141.92 4970.88,4131.92 4980.85,4128.7
  region net FA11: 4616.89,4155.36 4627.9,4156.93 4630.16,4166.93 4620.21,4169.99
  region net FA11: 4967.65,4169.43 4957.27,4166.93 4957.27,4156.93 4967.65,4154.43
  region net FA10: 4606.88,4179.79 4617.69,4181.68 4619.24,4191.68 4609.19,4194.61
  region net FA10: 4945.58,4194.2 4935.21,4191.68 4935.3,4181.68 4945.7,4179.2
  region net FA9: 4585.78,4196.37 4591.36,4205.48 4584.29,4212.55 4575.17,4206.98
  region net FA9: 4922.2,4217.53 4912.23,4214.49 4914.39,4204.49 4925.36,4202.87
  region net FA8: 4557.93,4196.61 4555.81,4201.87 4545.81,4201.87 4543.01,4198.13
  region net FA8: 4898.6,4235.71 4888.25,4232.58 4894.76,4222.58 4906.78,4223.14
  region net FA7: 4532.68,4195.25 4537.81,4204.42 4529.88,4210.63 4520.87,4204.49
  region net FA7: 4699.78,4253.3 4689.88,4250.08 4693.94,4240.08 4705.42,4239.4
  region net FA3: 4315.81,4101.64 4326.28,4104.03 4326.58,4114.03 4316.26,4116.63
  region net FA3: 4623.03,4343.58 4612.44,4341.37 4611.65,4331.37 4621.85,4328.63
  region net FA4: 4264.7,4108.71 4270.28,4117.82 4263.21,4124.89 4254.1,4119.31
  region net FA4: 4646.19,4362.14 4634.65,4361.59 4630.36,4351.59 4640.28,4348.36
  region net FA5: 4235.95,4110.11 4241.52,4119.22 4234.45,4126.29 4225.34,4120.72
  region net FA5: 4678.97,4342.75 4676.13,4352.88 4666.13,4351.75 4664.06,4341.06
  region net FA6: 4204.39,4110.81 4209.96,4119.92 4202.89,4126.99 4193.78,4121.42
  region net FA6: 4691.55,4380.92 4682.34,4385.76 4677.01,4376.94 4683.79,4368.08
  region net FA0: 4613.36,3553.82 4615.1,3559.1 4608.03,3566.17 4602.75,3564.43
  region net FA0: 4604.2,3598.95 4606.56,3588.46 4616.56,3588.09 4619.18,3598.38
  region net FA0: 4664.4,3677.55 4655.29,3683.13 4648.22,3676.06 4653.8,3666.95
  region net FA0: 4608.08,3698.76 4618.47,3701.26 4618.47,3711.26 4608.08,3713.76
  region net FA0: 4594.44,3822.16 4584.22,3819.44 4584.93,3809.44 4595.5,3807.19
  region net FA0: 4159.28,3789.18 4171.46,3788.24 4178.77,3798.24 4168.13,3801.29
  region net VCC: 3431.39,3444.82 3422.28,3450.4 3415.2,3443.32 3420.78,3434.21
  region net VCC: 3436.79,3529.76 3442.36,3538.87 3435.29,3545.94 3426.18,3540.36
  region net VCC: 3425.33,3540.27 3413.31,3540.82 3406.84,3530.82 3417.18,3527.68
  region net VCC: 3943.91,4134.21 3933.52,4131.71 3933.52,4121.71 3943.91,4119.21
  region net VCC: 3899.39,4119.07 3909.67,4121.71 3909.23,4131.71 3898.74,4134.06
  region net VCC: 4342.56,4195.71 4339.48,4205.65 4329.48,4203.25 4327.97,4192.21
  region net VCC: 4044.78,4234.31 4054.94,4237.1 4053.98,4247.1 4043.34,4249.24
  region net VCC: 3901.47,3606.76 3911.85,3609.26 3911.85,3619.26 3901.47,3621.76
  region net VCC: 4185.35,3621.76 4174.97,3619.26 4174.97,3609.26 4185.35,3606.76
  region net VCC: 4197.82,3652.22 4208.2,3654.72 4208.2,3664.72 4197.82,3667.22
  region net VCC: 4349.64,3664.99 4337.96,3664.72 4333.11,3654.72 4343.09,3651.5
  region net VCC: 4420.69,4282.22 4415.11,4273.1 4422.18,4266.03 4431.29,4271.61
  region net VCC: 5038.62,3427.05 5033.04,3417.94 5040.11,3410.87 5049.22,3416.45
  region net VCC: 4916.95,3332.29 4926.87,3335.41 4924.22,3345.41 4913.11,3346.79
  region net VCC: 4850.52,3347.02 4848.02,3357.41 4838.02,3357.41 4835.52,3347.02
  region net VCC: 4835.22,3443.26 4838.02,3433.11 4848.02,3434.14 4850.14,3444.8
  region net VCC: 4558.65,3346.04 4556.15,3356.42 4546.15,3356.42 4543.65,3346.04
  region net VCC: 4542.93,3504.59 4546.15,3494.66 4556.15,3499.15 4556.61,3510.74
  region net VCC: 4438.03,3643.93 4441.07,3633.95 4451.07,3636.06 4452.7,3647.03
  region net VCC: 4517.56,3557.49 4508.44,3563.07 4501.37,3555.99 4506.95,3546.88
  region net VCC: 3848.54,3806 3838.5,3803.06 3840.13,3793.06 3850.96,3791.2
  region net AD15: 4339.51,3821.79 4329.13,3819.29 4329.13,3809.29 4339.51,3806.79
  region net AD15: 4177.94,4047.48 4167.29,4045.35 4166.29,4035.35 4176.45,4032.55
  region net AD15: 4191.1,4032.55 4201.26,4035.35 4200.26,4045.35 4189.61,4047.48
  region net AD15: 4188.47,3807.19 4199.13,3809.29 4200.21,3819.29 4190.06,3822.1
  region net AD13: 3852.63,3768.61 3842.15,3766.24 3841.78,3756.24 3852.07,3753.62
  region net AD13: 3865.85,3753.62 3876.14,3756.24 3875.77,3766.24 3865.29,3768.61

## Silkscreen, mask and mechanical layers (free items; w line width, h text height)
Top Silkscreen Layer:
  text "opencartgba" at 3145.61,4294.18 h51.92
Bottom Silkscreen Layer:
  text "laqieer 2022" at 3611.58,4293.55 h51.92
  text "VCC" at 3876.22,4267.52 h25.96
  text "TDO" at 3979.57,4267.5 h25.96
  text "TDI" at 4064.93,4267.52 h25.96
  text "TMS" at 4168.28,4267.5 h25.96
  text "TCK" at 4270.53,4267.5 h25.96
  text "GND" at 4372.78,4267.5 h25.96

## Text inside footprints (layer, text, board x,y; h text height)
CART1: Top Silkscreen Layer "1" at 3192.82,3326.76 h20.59; Top Silkscreen Layer "32" at 5062.05,3326.83 h20.44